# Altium PCB PCB1.PcbDoc
Units mm, origin at the board's own origin, x right, y up, seen from the top; angles counter-clockwise.
Board outline 52.15 x 50.98 mm, 2 copper layers (Top Layer, Bottom Layer); 16 components, 15 nets, 52 pads, 7 vias.
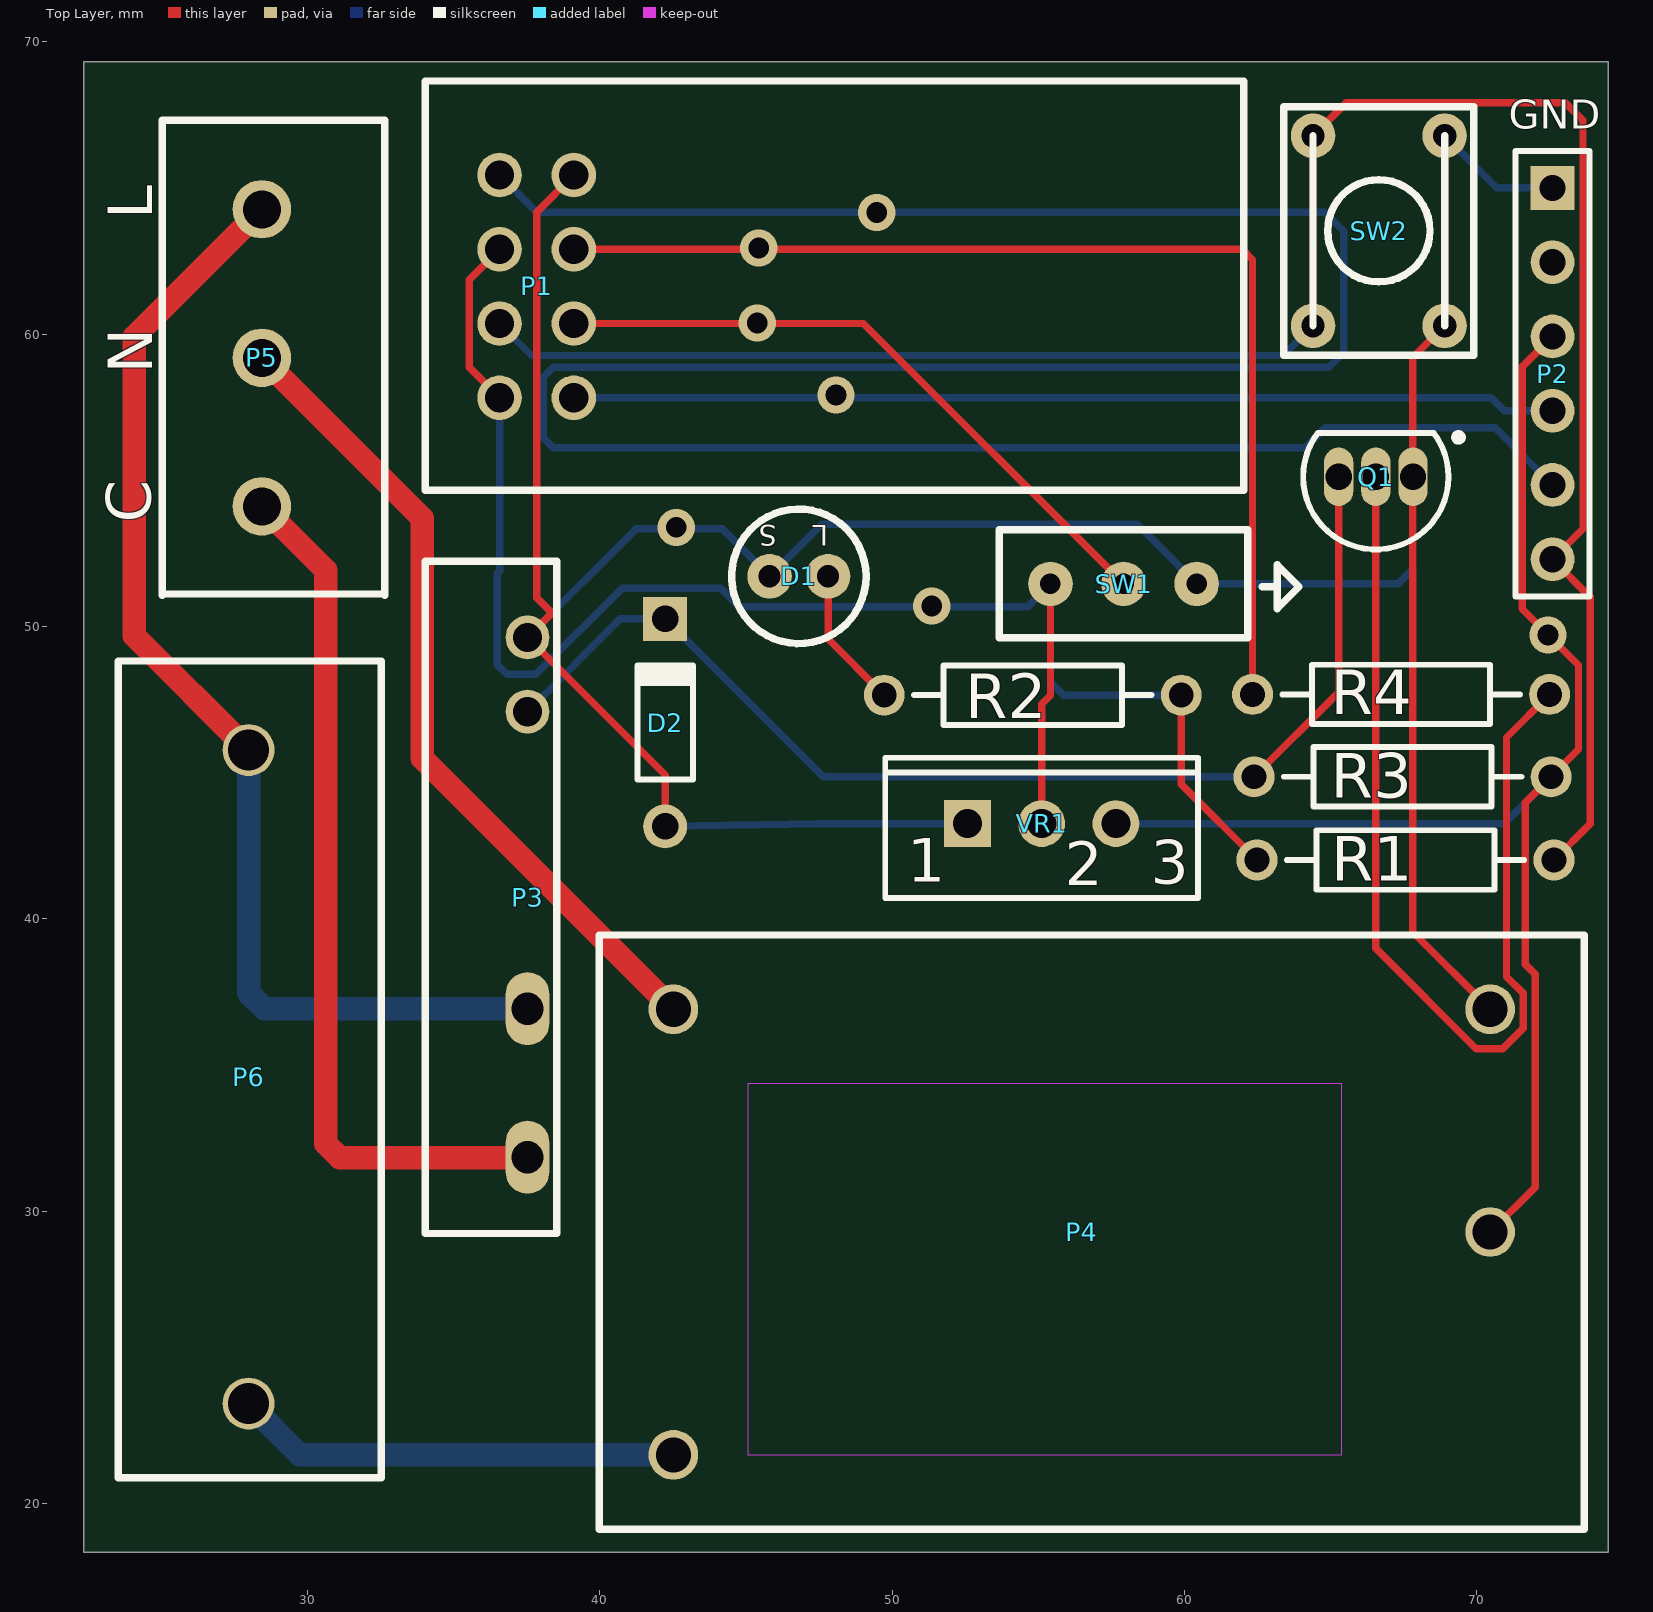
[diagram p0: Top Layer view]
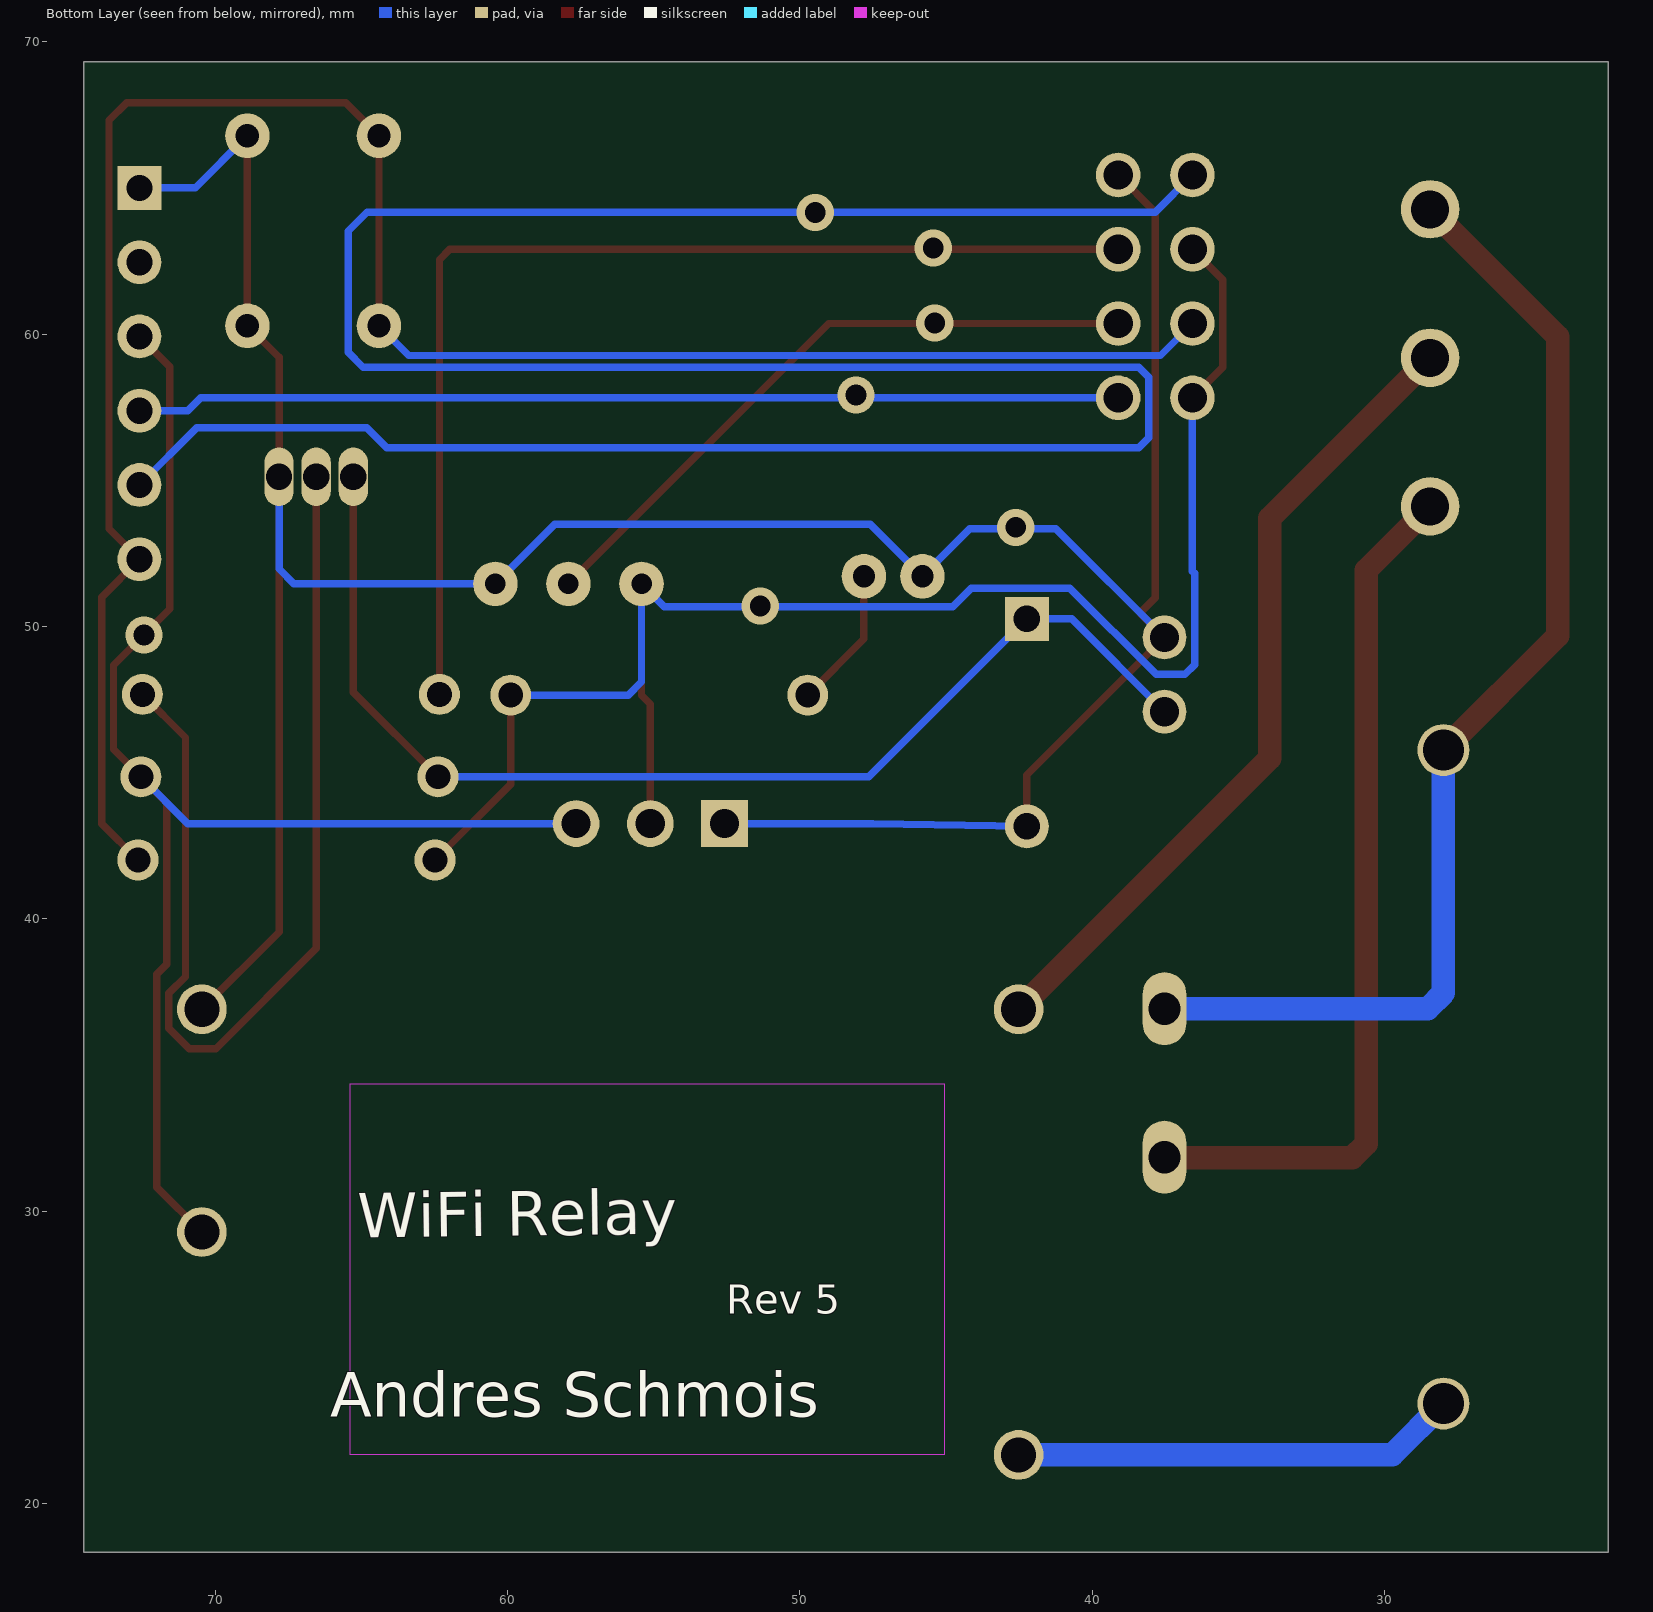
[diagram p1: Bottom Layer view, seen from below]

## Layer stack, top to bottom
Top Solder: solder mask 0.0102, Solder Resist, Dk 3.5
Top Layer: signal copper 0.0356
Dielectric 1: dielectric 0.32, FR-4, Dk 4.8
Bottom Layer: signal copper 0.0356
Bottom Solder: solder mask 0.0102, Solder Resist, Dk 3.5

## Board outline
22.352,18.339 74.5,18.339 74.5,69.317 22.352,69.317

## Design rules (kind name [scope] priority, off if disabled: settings)
Clearance "Schematic Clearance Constraint" [InNetClass('120vac')] p1: gap=1.35
Clearance [All] p2: gap=0.152
HoleSize [All] p1: absolutevalues=TRUE maxlimit=2.54 minlimit=0.33 maxpercent=80.000 minpercent=20.000
MinimumAnnularRing [All] p1: minimumring=0.178
PolygonConnect [All] p1: connectstyle=Relief reliefconductorwidth=0.254 reliefentries=4 polygonreliefangle="90 Angle" airgapwidth=0.254
RoomDefinition "Wifi Relay V3" [InComponentClass('Wifi Relay V3')] p1: confinementstyle=ConfineIn formatcopy=TRUE lockcomponents=FALSE outline 22.352,18.466 74.5,18.466 74.5,69.291 22.352,69.291
RoutingVias [All] p1: holewidth=0.711 width=1.27 viastyle="Through Hole" minholewidth=0.711 minwidth=1.27 maxholewidth=0.711 maxwidth=1.27
SolderMaskExpansion [All] p1: expansion=0.102
Width "Schematic Width Constraint" [InNetClass('120vac')] p1: maxlimit=10 minlimit=0.8 preferedwidth=0.8 minimp=50.000000 maximp=50.000000 favimp=50.000000
Width [All] p2: maxlimit=25.4 minlimit=0.152 preferedwidth=0.254
29 further rules are at their usual default settings.

## Classes and differential pairs
net class 120vac: COMM LIVE NetP4_L NEUTRAL

## Components (designator, comment, footprint, x,y, rotation, side; value= is the part's Value field where it differs from the comment)
D1 "LED0" LED 46.812,51.714 r180 top
D2 "Diode" DO-35 42.24,46.711 r90 top
P1 "ESP8266" ESP8266 34.036,68.656 r270 top
P2 "FTDI" HDR1X6 72.593,64.999 r270 top
P3 "SSR" RELAY 38.532,29.235 r90 top
P4 "120vac to 3.3vdc" "120VAC TO 3.3VDC" 39.98,19.126 r0 top
P5 "AC Terminal" "AC TERMINAL" 25.044,67.31 r270 top
P6 "Fuse Holder" "FUSE HOLDER" 30.531,20.879 r90 top
Q1 "2N2222" TO-92A 66.548,55.118 r90 top
R1 "3k3" AXIAL-0.4 67.564,42.012 r180 top
R2 "1K" AXIAL-0.4 54.813,47.65 r180 top
R3 "1k" AXIAL-0.4 67.462,44.856 r0 top
R4 "47k" AXIAL-0.4 67.412,47.676 r0 top
SW1 "FLASH" SWITCH 53.67,49.606 r0 top
SW2 "RESET" "MINI PUSH BUTTON" 69.901,59.284 r90 top
VR1 "LM1117" TO-220-AB 55.118,43.256 r0 top

## Footprints (in the part's own frame and the unit in brackets; to place one, negate y for a bottom-side part, rotate by r counter-clockwise, add the part's x,y. Pads: shape width x height; smd on the part's side, far side on the other; paste and mask are expansions set on the pad)
"120VAC TO 3.3VDC" [mm]
  round 1.7 hole 1.2: +V(30.48,10.16) -V(30.48,17.78) L(2.54,2.54) N(2.54,17.78)
  Keep-Out Layer region: 5.08,2.54 25.4,2.54 25.4,15.24 5.08,15.24
  silkscreen extent 0,0 33.7,20.32
"AC TERMINAL" [mm]
  round 2 hole 1.3: 1(3.04,3.4) 2(8.12,3.4) 3(13.2,3.4)
  silkscreen extent 0,0 16.24,7.6
AXIAL-0.4 [mm] "Axial Device, Thru-Hole; 2 Leads; 0.4 in Pin Spacing"
  round 1.4 hole 0.85: 1(-5.08,0) 2(5.08,0)
  silkscreen extent -4.06,-1.02 4.06,1.02
DO-35 [mm] "Diode, Axial; Body 3.8 x 1.9 mm (LxDia. max), Lead Dia. 0.53 mm (max)"
  round 1.5 hole 0.9: 1(-3.55,0)
  rect 1.5x1.5 hole 0.9: 2(3.55,0)
  silkscreen extent -1.95,-0.95 2.05,0.95
ESP8266 [mil]
  round 60 hole 39.37: 1(126.57,200) 2(226.57,200) 3(326.57,200) 4(426.57,200) 5(126.57,100) 6(226.57,100) 7(326.57,100) 8(426.57,100)
  silkscreen extent 0,0 551,1102
"FUSE HOLDER" [mil] "5mm x 20mm"
  round 70 hole 55: 1(100,100) 2(980,100)
  silkscreen extent 0,-79 1100,276
HDR1X6 [mm] "Connector; Header; 6 Position"
  rect 1.5x1.5 hole 0.9: 1(0,0)
  round 1.5 hole 0.9: 2(2.54,0) 3(5.08,0) 4(7.62,0) 5(10.16,0) 6(12.7,0)
  silkscreen extent -1.27,-1.27 13.97,1.27
LED [mil]
  round 60 hole 30: 1(-39.37,0) 2(39.37,0)
  silkscreen extent -91,-91 90,91
"MINI PUSH BUTTON" [mm]
  round 1.524 hole 0.8: 1(1,1) 2(7.5,1) 3(1,5.5) 4(7.5,5.5)
  silkscreen extent 0,0 8.5,6.5
RELAY [mm]
  oval 2.5x1.5 hole 1.1: 1(2.61,1) 2(7.69,1)
  round 1.5 hole 1: 3(17.85,1) 4(20.39,1)
  silkscreen extent 0,0 23,4.5
SWITCH [mm]
  round 1.524 hole 0.7: 1(1.75,1.85) 2(6.75,1.85) C(4.25,1.85)
  silkscreen extent 0,0 10.25,3.7
TO-92A [mm] "TO, Flat Index; 3 In-Line, Axial Leads; Body Dia. 4.5mm; Leads 0.51 x 0.48 mm (max)"
  oval 2x1 hole 0.9: 1(0,-1.27) 2(0,0) 3(0,1.27)
  silkscreen extent -2.48,-2.96 1.5,2.48, body extent -2.5,-2.5 1.5,2.5, height 6.86
TO-220-AB [mm] "TO, Thru-Hole, Vertical, Heatsink Mounted; 3 In-Line Leads; Pitch 2.54 mm"
  rect 1.6x1.6 hole 1: 1(-2.54,0)
  round 1.6 hole 1: 2(0,0) 3(2.54,0)
  silkscreen extent -5.35,-2.55 5.35,2.25

## Part data
D1: "Typical INFRARED GaAs LED"
D2: library part "Diode 1N914", "High Conductance Fast Diode"
P1: library part "Header 4X2A", "Header, 4-Pin, Dual row"
P2: library part "Header 6", "Header, 6-Pin"
P5: library part "Header 3", "Header, 3-Pin"
Q1: library part 2N3904, "NPN 2N2222"
R1 R2 R3 R4: library part Res2, "Resistor"
SW1: library part SW-SPDT, "SPDT Subminiature Toggle Switch, Right Angle Mounting, Vertical Actuation"
SW2: library part "WE-Tact Switches WS-TATV 430456085736", "WS-TATV THT Tact Switch 12X12 mm"
VR1: library part "Volt Reg", "Voltage Regulator"

## Via types
v1: diameter 1.27, hole 0.711, Top Layer to Bottom Layer, 7 vias

## Nets (pads, with @x,y where several pads share a name; then routed paths per layer and width w, separated by ;. In a path a pad name is that pad's centre, name@x,y a point inside that pad or via, vN(x,y) a via of type N, cw(c..) or ccw(c..) an arc to the next point about the centre after c; other vN are vias at no path point)
3V3: P1.6 P1.8 R1.2 R2.1 SW1.1 VR1.2 | length 59
  Top Layer w0.254: P1.8 35.535,58.863 35.535,61.86 P1.6 ; VR1.2 55.118,47.346 55.42,47.648 SW1.1 ; R2.1 59.893,44.602 R1.2
  Bottom Layer w0.254: P1.8 36.576,51.892 36.5,51.816 36.5,48.692 36.83,48.362 37.821,48.362 40.767,51.308 44.145,51.308 44.78,50.673 54.637,50.673 SW1.1 55.42,48.11 55.88,47.65 R2.1
  other v1: 51.359,50.698
COMM: P3.1 P5.3 | length 29.8
  Top Layer w0.8: P5.3 30.632,51.922 30.632,32.309 31.115,31.826 37.532,31.826 P3.1
GND: D1.2 D2.1 P1.1 P2.1 P3.4 P4.-V Q1.1 SW1.2 SW2.1 SW2.2 VR1.1 | length 108.9
  Top Layer w0.254: P1.1 37.846,64.171 37.846,50.984 38.329,50.502 38.329,50.422 P3.4 42.24,44.917 D2.1 ; SW2.2 SW2.1 67.818,59.201 Q1.1 67.818,39.548 P4.-V
  Bottom Layer w0.254: P3.4 41.246,53.34 44.187,53.34 D1.2 47.59,53.492 58.384,53.492 SW1.2 67.31,51.456 67.818,51.964 Q1.1 ; D2.1 47.517,43.256 VR1.1 ; SW2.2 70.686,64.999 P2.1
  other v1: 42.621,53.391
GPIO0: P1.3 SW1.C | length 22.5
  Top Layer w0.254: P1.3 49.015,60.361 SW1.C
  other v1: 45.39,60.376
GPIO2: P1.2 R4.1 | length 38.2
  Top Layer w0.254: P1.2 61.978,62.901 62.332,62.547 R4.1
  other v1: 45.441,62.941
LIVE: P3.2 P5.1 P6.2 | length 40
  Top Layer w0.8: P6.2 24.079,49.682 24.079,59.905 P5.1
  Bottom Layer w0.8: P6.2 27.991,37.465 28.53,36.925 P3.2
NetD1_1: D1.1 R2.2 | length 4.9
  Top Layer w0.254: D1.1 47.812,49.571 R2.2
NetD2_2: D2.2 P3.3 Q1.3 R3.1 | length 39.9
  Top Layer w0.254: R3.1 65.278,47.752 Q1.3
  Bottom Layer w0.254: P3.3 40.707,50.261 D2.2 47.644,44.856 R3.1
NetP4_L: P4.L P6.1 | length 15.3
  Bottom Layer w0.8: P6.1 29.743,21.666 P4.L
NetQ1_2: Q1.2 R4.2 | length 35.1
  Top Layer w0.254: Q1.2 66.548,38.989 69.977,35.56 70.891,35.56 71.589,36.258 71.589,37.453 71.018,38.024 71.018,46.203 R4.2
NEUTRAL: P4.N P5.2 | length 28.1
  Top Layer w0.8: P5.2 33.934,53.7 33.934,45.491 P4.N
RST: P1.7 P2.6 R1.1 SW2.3 SW2.4 | length 71.9
  Top Layer w0.254: SW2.3 SW2.4 65.537,67.92 73.025,67.92 73.635,67.31 73.635,53.34 P2.6 73.889,51.003 73.889,43.256 R1.1
  Bottom Layer w0.254: P1.7 37.668,59.269 63.386,59.269 SW2.3
RXD: P1.4 P2.4 | length 33.7
  Bottom Layer w0.254: P1.4 70.5,57.821 70.942,57.379 P2.4
  other v1: 48.082,57.912
TXD: P1.5 P2.5 | length 99.4
  Bottom Layer w0.254: P1.5 37.846,64.171 64.81,64.171 65.456,63.525 65.456,59.372 64.946,58.863 38.417,58.863 38.075,58.52 38.075,56.451 38.417,56.109 64.135,56.109 64.821,56.794 70.637,56.794 P2.5
  other v1: 49.479,64.16
VCC: P2.3 P4.+V R3.2 VR1.3 | length 48.9
  Top Layer w0.254: P4.+V 71.995,30.822 71.995,38.1 71.653,38.442 71.653,43.967 R3.2 73.482,45.796 73.482,48.666 71.552,50.597 71.552,58.877 P2.3
  Bottom Layer w0.254: VR1.3 70.942,43.256 R3.2
  other v1: 72.441,49.708
pads on no net: P2.2

## Silkscreen, mask and mechanical layers (free items; w line width, h text height)
Top Overlay:
  text "GND" at 71.095,67.031 h1
  text "L" at 24.689,63.932 h1.52 r90
  text "N" at 24.689,58.649 h1.52 r90
  text "C" at 24.638,53.543 h1.52 r90
Bottom Overlay:
  text "WiFi Relay" at 65.126,29.083 h1.52 r359.3
  text "Rev 5" at 52.527,26.492 h1
  text "Andres Schmois" at 66.065,22.962 h1.52
Mechanical 1:
  the board outline again, w0.254

## Text inside footprints (layer, text, board x,y; h text height)
D1: Top Overlay "L" at 47.812,53.464 h0.7 r180; Top Overlay "S" at 46.062,53.464 h0.7 r180
VR1: Top Overlay "1" at 50.521,41.275 h1.5; Top Overlay "2" at 55.905,41.148 h1.5; Top Overlay "3" at 58.852,41.199 h1.5